# EAGLE board schematic (EAGLE 8.4.1)

Size 100 x 80 mm. Coordinates in mm from the lower left corner, seen from the top.
Outline: 0,0 100,0 100,80 0,80 0,0
Copper layers (1*16): Top 0.035mm / dielectric 1.5mm / Bottom 0.035mm
Design rules "default": minimum track width 6mil, minimum drill 0.35mm, track to track 6mil, track to pad 6mil, pad to pad 6mil, via to via 6mil, smd to smd 6mil, copper to edge 40mil, drill to drill 6mil, minimum pad ring 10mil, minimum via ring 8mil, stop-mask expansion 4mil, vias tented up to drill 0mil, thermal gap 10mil

## Footprints (pad centres in the part's own frame; a part is rotated, then mirrored left to right if it is on the bottom)
C0805 = smd 1.3 x 1.5: 1 -0.95,0; 2 0.95,0
DIL28 = drill 0.889 pad 1.524 square: 1 -16.51,-7.62 | drill 0.889 pad 1.524 octagon: 2 -13.97,-7.62; 3 -11.43,-7.62; 4 -8.89,-7.62; 5 -6.35,-7.62; 6 -3.81,-7.62; 7 -1.27,-7.62; 8 1.27,-7.62; 9 3.81,-7.62; 10 6.35,-7.62; 11 8.89,-7.62; 12 11.43,-7.62; 13 13.97,-7.62; 14 16.51,-7.62; 15 16.51,7.62; 16 13.97,7.62; 17 11.43,7.62; 18 8.89,7.62; 19 6.35,7.62; 20 3.81,7.62; 21 1.27,7.62; 22 -1.27,7.62; 23 -3.81,7.62; 24 -6.35,7.62; 25 -8.89,7.62; 26 -11.43,7.62; 27 -13.97,7.62; 28 -16.51,7.62
MULTIWATT-15 = drill 1.2 long: 1 -8.89,-7.62; 2 -7.62,-2.54; 3 -6.35,-7.62; 4 -5.08,-2.54; 5 -3.81,-7.62; 6 -2.54,-2.54; 7 -1.27,-7.62; 8 0,-2.54; 9 1.27,-7.62; 10 2.54,-2.54; 11 3.81,-7.62; 12 5.08,-2.54; 13 6.35,-7.62; 14 7.62,-2.54; 15 8.89,-7.62
AVR-ISP-10 = drill 1.016 square: 1 -5.08,-1.27 | drill 1.016 octagon: 2 -5.08,1.27; 3 -2.54,-1.27; 4 -2.54,1.27; 5 0,-1.27; 6 0,1.27; 7 2.54,-1.27; 8 2.54,1.27; 9 5.08,-1.27; 10 5.08,1.27
QS = drill 0.61 long: 1 -2.54,0; 2 2.54,0
0207/10 = drill 0.813 octagon: 1 -5.08,0; 2 5.08,0
6MM_SWITCH = smd 2.286 x 1.524: 1 -3.302,2.286; 2 3.302,2.286; 3 -3.302,-2.286; 4 3.302,-2.286
ULTRASONIC-HC-SR04 = drill 1 square: 1 -3.81,-8.89 | drill 1: 2 -1.27,-8.89; 3 1.27,-8.89; 4 3.81,-8.89 | hole 1.8: -21.1,8.4; -21.1,-8.8; 21.1,-8.8; 21.1,8.4

## Placement (x,y rotation side)
C1  [C0805]  -40.64,62.23 0 top  (outside the outline)
C2  [C0805]  -45.72,62.23 0 top  (outside the outline)
IC1  [DIL28]  -31.75,35.56 0 top  (outside the outline)
IC2  L298  [MULTIWATT-15]  -24.13,58.42 0 top  (outside the outline)
JP1  AVR-ISP-10  [AVR-ISP-10]  -40.64,49.53 0 top  (outside the outline)
Q1  [QS]  -19.05,63.5 0 top  (outside the outline)
R1  [0207/10]  -31.75,62.23 0 top  (outside the outline)
S1  [6MM_SWITCH]  -53.34,48.26 0 top  (outside the outline)
U$1  ULTRASONIC-HC-SR04  [ULTRASONIC-HC-SR04]  -35.56,13.97 0 top  (outside the outline)

## Library data of the parts
C1 C2 = eagle-ltspice; SPICEMODEL: NONE; SPICEPREFIX: C
IC1 = atmel_tiny24-44-84tiny48-88mega48-88-168-328
IC2 = st-microelectronics; MPN: L298N; OC_FARNELL: 1589425; OC_NEWARK: 32M1527
JP1 = atmel
Q1 = special
R1 = rcl
S1 = fab
U$1 = diy-modules

## Nets
AVCC: IC1.20
GND: IC1.8 IC1.22 IC2.8 U$1.4
N$1: IC1.17 JP1.1
N$2: IC1.18 JP1.9
N$3: IC1.19 JP1.7
N$4: IC1.1 JP1.5
UCC: IC1.7
VCC: IC2.9 JP1.2 U$1.1
VS: IC2.4

## Tracks (layer width: path | path; a pad name or v marks a point on that pad's centre or on a via)
GND  (3 unrouted)
N$1  (1 unrouted)
N$2  (1 unrouted)
N$3  (1 unrouted)
N$4  (1 unrouted)
VCC  (2 unrouted)